# EAGLE board Sparkfun_LilyPad-Switched-Battery_Panel_v13 (EAGLE 7.5.0), part 1 of 2
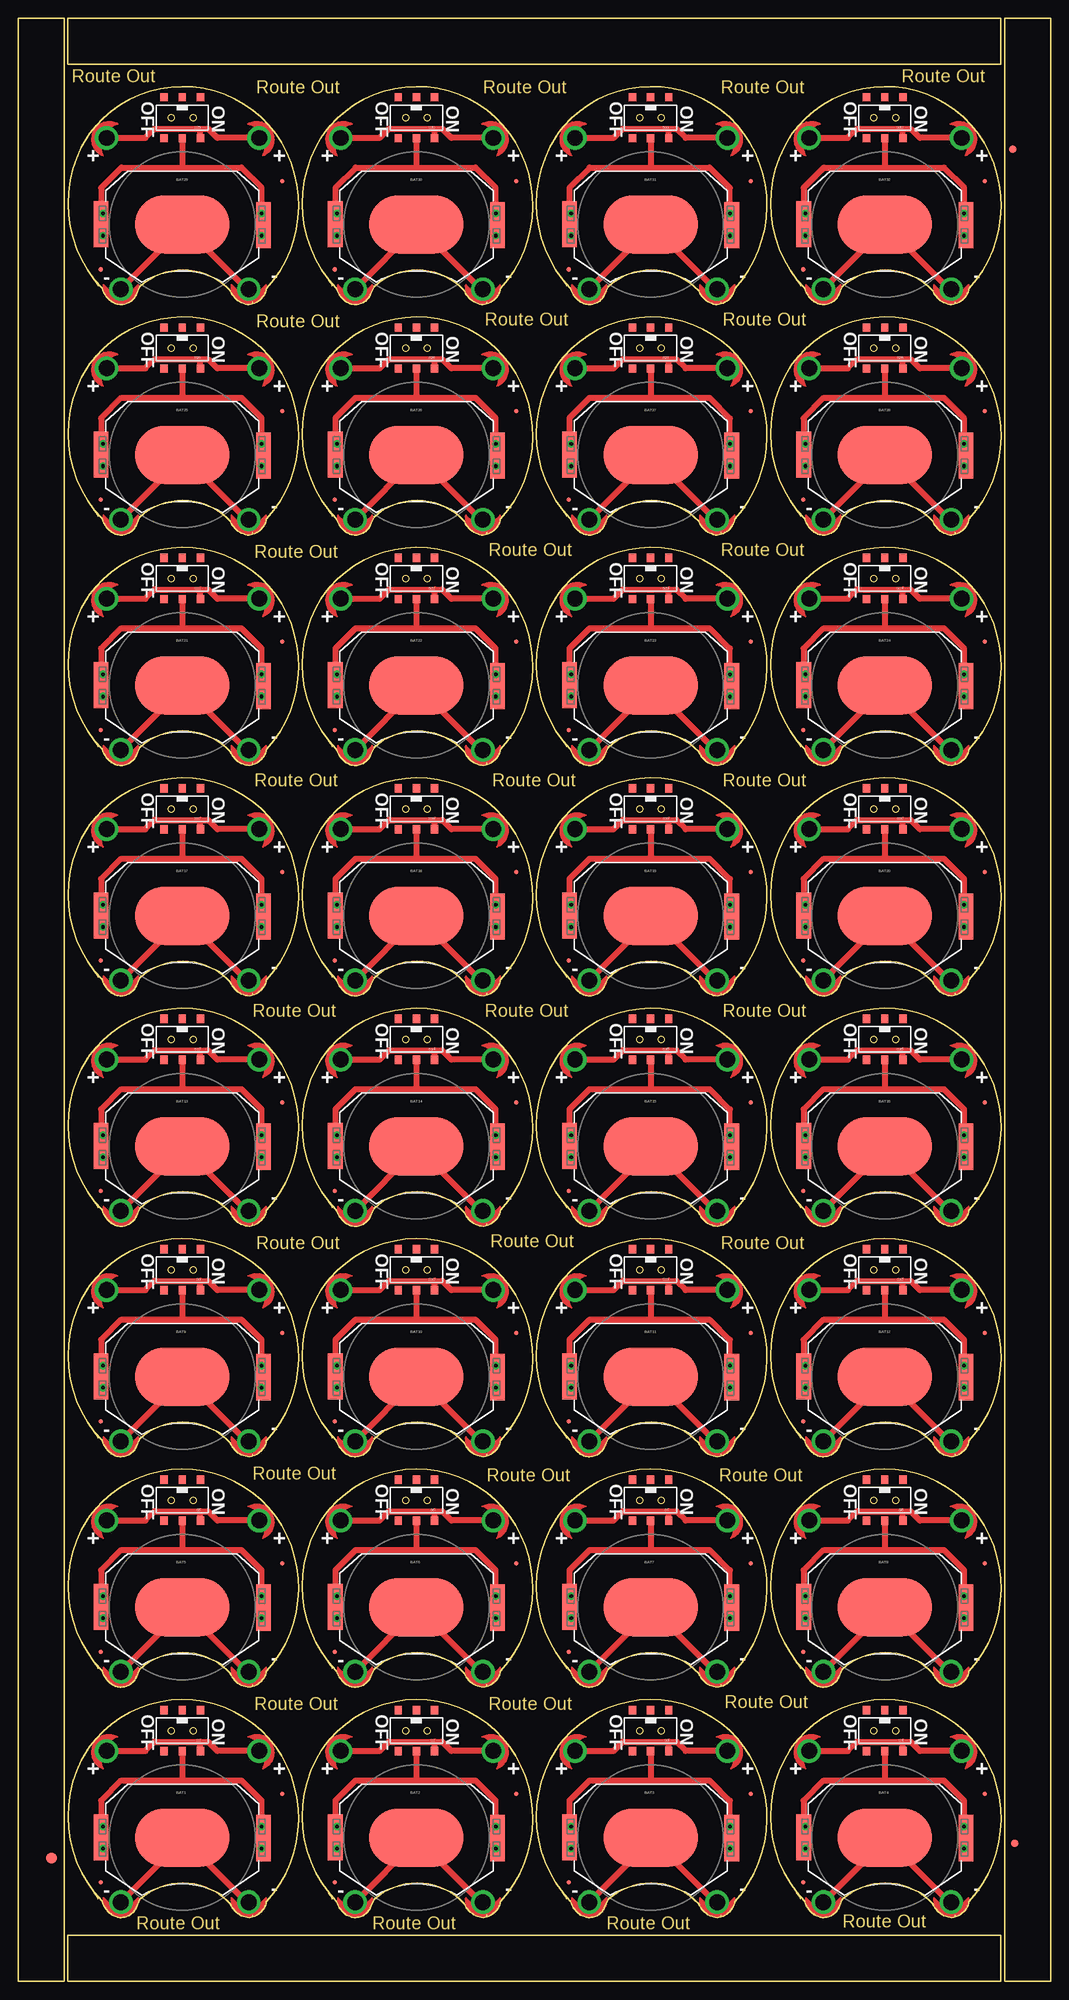
[diagram p0: board, top side]
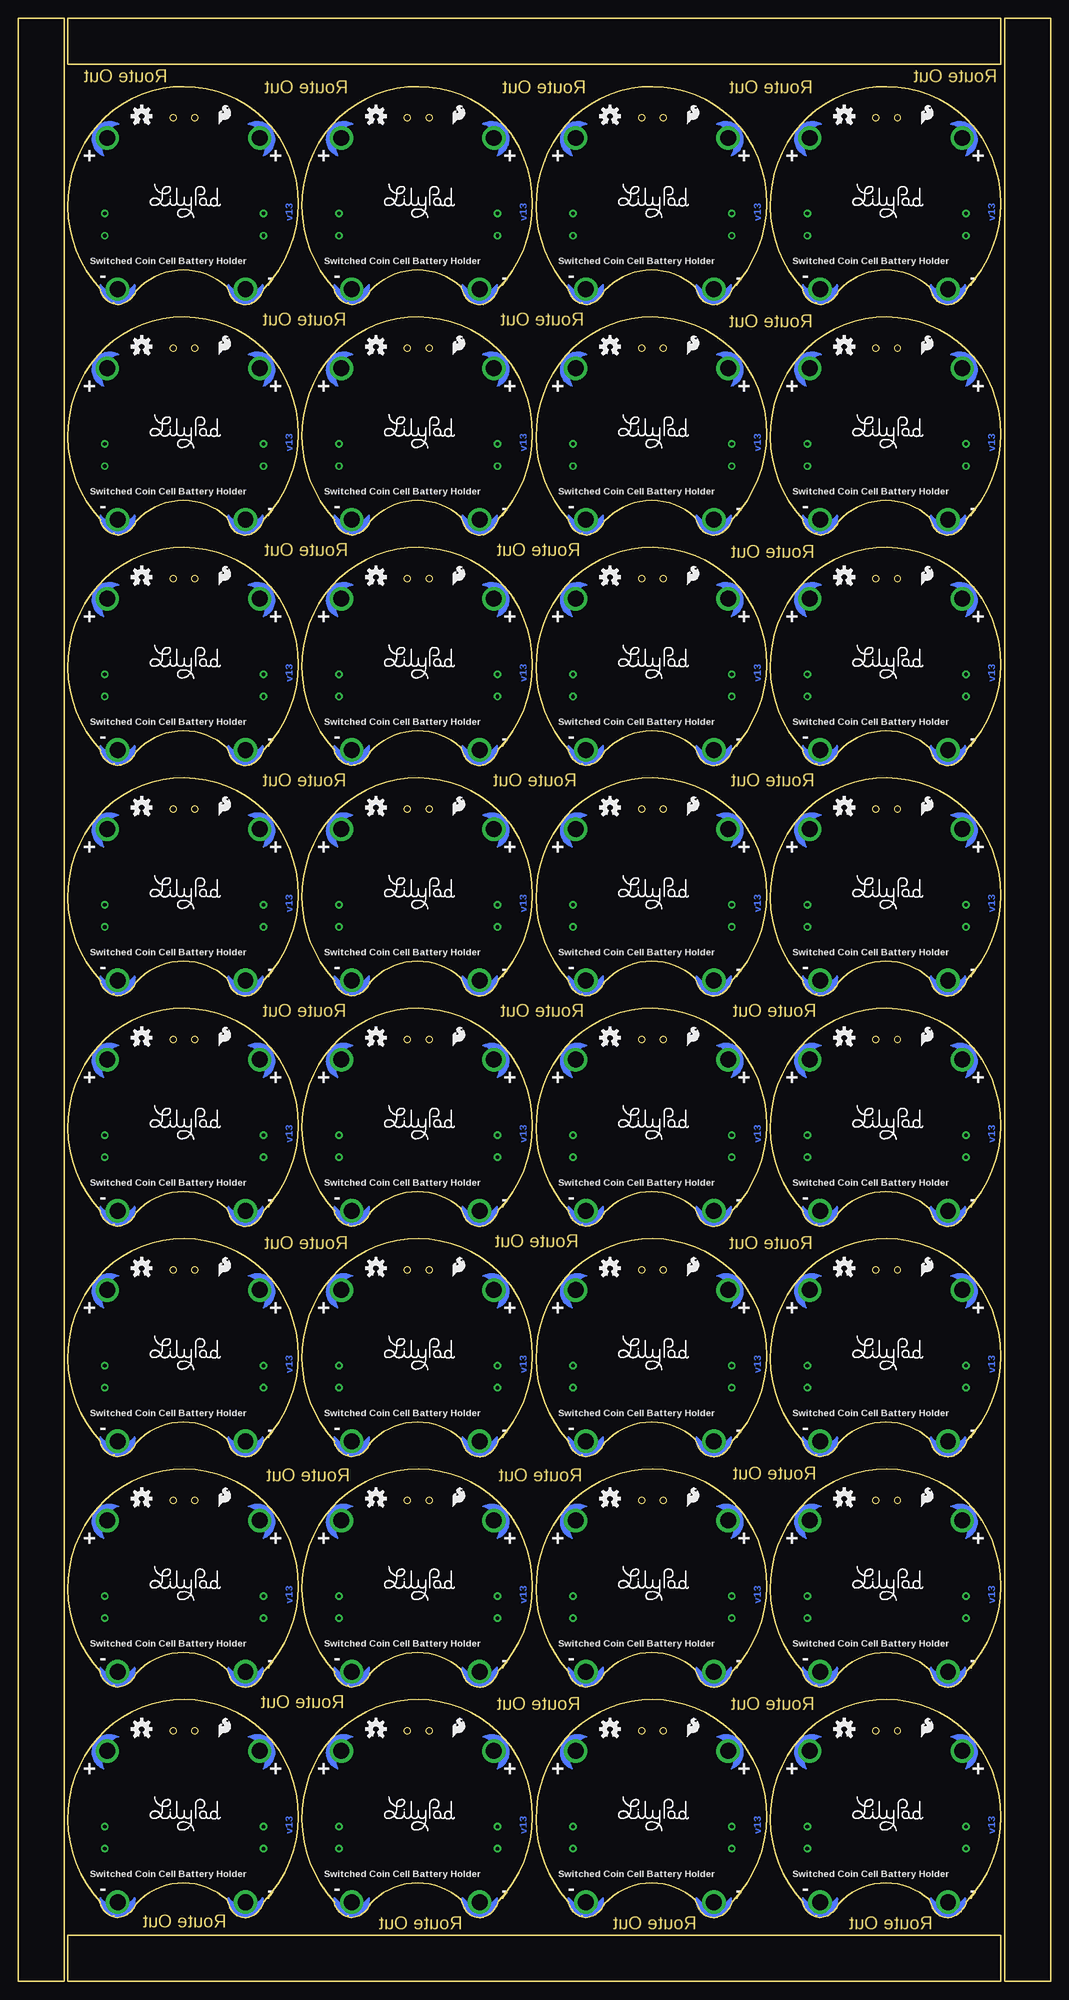
[diagram p1: board, bottom side, seen from below]

Size 142.24 x 270.51 mm. Coordinates in mm from the lower left corner, seen from the top.
Outline: 1880 segments
Outline: circle at 21.11,34.52 radius 0.42
Outline: circle at 24.11,34.52 radius 0.42
Outline: circle at 21.11,34.52 radius 0.42
Outline: circle at 24.11,34.52 radius 0.42
Outline: circle at 53.36,34.52 radius 0.42
Outline: circle at 56.36,34.52 radius 0.42
Outline: circle at 53.36,34.52 radius 0.42
Outline: circle at 56.36,34.52 radius 0.42
Outline: circle at 85.62,34.52 radius 0.42
Outline: circle at 88.62,34.52 radius 0.42
Outline: circle at 85.62,34.52 radius 0.42
Outline: circle at 88.62,34.52 radius 0.42
Outline: circle at 117.88,34.52 radius 0.42
Outline: circle at 120.88,34.52 radius 0.42
Outline: circle at 117.88,34.52 radius 0.42
Outline: circle at 120.88,34.52 radius 0.42
Outline: circle at 21.11,66.27 radius 0.42
Outline: circle at 24.11,66.27 radius 0.42
Outline: circle at 21.11,66.27 radius 0.42
Outline: circle at 24.11,66.27 radius 0.42
Copper layers (1*16): Top 0.035mm / dielectric 1.5mm / Bottom 0.035mm
Design rules "SparkFun-2-layer-STANDARD *": minimum track width 10mil, minimum drill 20mil, track to track 10mil, track to pad 8mil, pad to pad 8mil, via to via 10mil, smd to smd 8mil, copper to edge 8mil, drill to drill 8mil, minimum pad ring 10mil, minimum via ring 10mil, stop-mask expansion 4mil, vias tented up to drill 25mil, thermal gap 10mil
Net classes: 1 VCC: width 0.203 mm

## Footprints (pad centres in the part's own frame; a part is rotated, then mirrored left to right if it is on the bottom)
BATTCON_20MM_4LEGS = smd 13 x 8: NEGATIVE 0,0 | smd 2.032 x 3.175: POSITIVE@1 -11.176,1.651; POSITIVE@2 -11.176,-1.524; POSITIVE@3 11.176,1.524; POSITIVE@4 11.176,-1.651
PETAL-SMALL-2SIDE = drill 2.2: 1 0,0
FIDUCIAL-1.5X3 = smd 1.5 x 1.5: 1 0,0
FIDUCIAL-1X2 = smd 1 x 1: 1 0,0
MICRO-FIDUCIAL = smd 0.635 x 0.635: 1 0,0
AYZ0202 = smd 1 x 1.15: 1 -2.5,2.825; 2 0,2.825; 3 2.5,2.825; 4 -2.5,-2.825; 5 0,-2.825; 6 2.5,-2.825 | hole 0.85: 1.5,0; -1.5,0

## Placement (x,y rotation side)
BAT1  20mm coincell  [BATTCON_20MM_4LEGS]  22.61,19.81 0 top
BAT2  20mm coincell  [BATTCON_20MM_4LEGS]  54.86,19.81 0 top
BAT3  20mm coincell  [BATTCON_20MM_4LEGS]  87.12,19.81 0 top
BAT4  20mm coincell  [BATTCON_20MM_4LEGS]  119.38,19.81 0 top
BAT5  20mm coincell  [BATTCON_20MM_4LEGS]  22.61,51.56 0 top
BAT6  20mm coincell  [BATTCON_20MM_4LEGS]  54.86,51.56 0 top
BAT7  20mm coincell  [BATTCON_20MM_4LEGS]  87.12,51.56 0 top
BAT8  20mm coincell  [BATTCON_20MM_4LEGS]  119.38,51.56 0 top
BAT9  20mm coincell  [BATTCON_20MM_4LEGS]  22.61,83.31 0 top
BAT10  20mm coincell  [BATTCON_20MM_4LEGS]  54.86,83.31 0 top
BAT11  20mm coincell  [BATTCON_20MM_4LEGS]  87.12,83.31 0 top
BAT12  20mm coincell  [BATTCON_20MM_4LEGS]  119.38,83.31 0 top
BAT13  20mm coincell  [BATTCON_20MM_4LEGS]  22.61,115.06 0 top
BAT14  20mm coincell  [BATTCON_20MM_4LEGS]  54.86,115.06 0 top
BAT15  20mm coincell  [BATTCON_20MM_4LEGS]  87.12,115.06 0 top
BAT16  20mm coincell  [BATTCON_20MM_4LEGS]  119.38,115.06 0 top
BAT17  20mm coincell  [BATTCON_20MM_4LEGS]  22.61,146.81 0 top
BAT18  20mm coincell  [BATTCON_20MM_4LEGS]  54.86,146.81 0 top
BAT19  20mm coincell  [BATTCON_20MM_4LEGS]  87.12,146.81 0 top
BAT20  20mm coincell  [BATTCON_20MM_4LEGS]  119.38,146.81 0 top
BAT21  20mm coincell  [BATTCON_20MM_4LEGS]  22.61,178.56 0 top
BAT22  20mm coincell  [BATTCON_20MM_4LEGS]  54.86,178.56 0 top
BAT23  20mm coincell  [BATTCON_20MM_4LEGS]  87.12,178.56 0 top
BAT24  20mm coincell  [BATTCON_20MM_4LEGS]  119.38,178.56 0 top
BAT25  20mm coincell  [BATTCON_20MM_4LEGS]  22.61,210.31 0 top
BAT26  20mm coincell  [BATTCON_20MM_4LEGS]  54.86,210.31 0 top
BAT27  20mm coincell  [BATTCON_20MM_4LEGS]  87.12,210.31 0 top
BAT28  20mm coincell  [BATTCON_20MM_4LEGS]  119.38,210.31 0 top
BAT29  20mm coincell  [BATTCON_20MM_4LEGS]  22.61,242.06 0 top
BAT30  20mm coincell  [BATTCON_20MM_4LEGS]  54.86,242.06 0 top
BAT31  20mm coincell  [BATTCON_20MM_4LEGS]  87.12,242.06 0 top
BAT32  20mm coincell  [BATTCON_20MM_4LEGS]  119.38,242.06 0 top
BATB-  SEWTAP6  [PETAL-SMALL-2SIDE]  14.15,10.92 0 top
BATB-1  SEWTAP6  [PETAL-SMALL-2SIDE]  46.41,10.92 0 top
BATB-2  SEWTAP6  [PETAL-SMALL-2SIDE]  31.78,10.92 0 top
BATB-3  SEWTAP6  [PETAL-SMALL-2SIDE]  64.03,10.92 0 top
BATB-4  SEWTAP6  [PETAL-SMALL-2SIDE]  78.66,10.92 0 top
BATB-5  SEWTAP6  [PETAL-SMALL-2SIDE]  96.29,10.92 0 top
BATB-6  SEWTAP6  [PETAL-SMALL-2SIDE]  110.92,10.92 0 top
BATB-7  SEWTAP6  [PETAL-SMALL-2SIDE]  128.55,10.92 0 top
BATB-8  SEWTAP6  [PETAL-SMALL-2SIDE]  14.15,42.67 0 top
BATB-9  SEWTAP6  [PETAL-SMALL-2SIDE]  31.78,42.67 0 top
BATB-10  SEWTAP6  [PETAL-SMALL-2SIDE]  46.41,42.67 0 top
BATB-11  SEWTAP6  [PETAL-SMALL-2SIDE]  64.03,42.67 0 top
BATB-12  SEWTAP6  [PETAL-SMALL-2SIDE]  78.66,42.67 0 top
BATB-13  SEWTAP6  [PETAL-SMALL-2SIDE]  96.29,42.67 0 top
BATB-14  SEWTAP6  [PETAL-SMALL-2SIDE]  110.92,42.67 0 top
BATB-15  SEWTAP6  [PETAL-SMALL-2SIDE]  128.55,42.67 0 top
BATB-16  SEWTAP6  [PETAL-SMALL-2SIDE]  14.15,74.42 0 top
BATB-17  SEWTAP6  [PETAL-SMALL-2SIDE]  31.78,74.42 0 top
BATB-18  SEWTAP6  [PETAL-SMALL-2SIDE]  46.41,74.42 0 top
BATB-19  SEWTAP6  [PETAL-SMALL-2SIDE]  64.03,74.42 0 top
BATB-20  SEWTAP6  [PETAL-SMALL-2SIDE]  78.66,74.42 0 top
BATB-21  SEWTAP6  [PETAL-SMALL-2SIDE]  96.29,74.42 0 top
BATB-22  SEWTAP6  [PETAL-SMALL-2SIDE]  110.92,74.42 0 top
BATB-23  SEWTAP6  [PETAL-SMALL-2SIDE]  128.55,74.42 0 top
BATB-24  SEWTAP6  [PETAL-SMALL-2SIDE]  14.15,106.17 0 top
BATB-25  SEWTAP6  [PETAL-SMALL-2SIDE]  31.78,106.17 0 top
BATB-26  SEWTAP6  [PETAL-SMALL-2SIDE]  46.41,106.17 0 top
BATB-27  SEWTAP6  [PETAL-SMALL-2SIDE]  64.03,106.17 0 top
BATB-28  SEWTAP6  [PETAL-SMALL-2SIDE]  78.66,106.17 0 top
BATB-29  SEWTAP6  [PETAL-SMALL-2SIDE]  96.29,106.17 0 top
BATB-30  SEWTAP6  [PETAL-SMALL-2SIDE]  110.92,106.17 0 top
BATB-31  SEWTAP6  [PETAL-SMALL-2SIDE]  128.55,106.17 0 top
BATB-32  SEWTAP6  [PETAL-SMALL-2SIDE]  14.15,137.92 0 top
BATB-33  SEWTAP6  [PETAL-SMALL-2SIDE]  31.78,137.92 0 top
BATB-34  SEWTAP6  [PETAL-SMALL-2SIDE]  46.41,137.92 0 top
BATB-35  SEWTAP6  [PETAL-SMALL-2SIDE]  64.03,137.92 0 top
BATB-36  SEWTAP6  [PETAL-SMALL-2SIDE]  78.66,137.92 0 top
BATB-37  SEWTAP6  [PETAL-SMALL-2SIDE]  96.29,137.92 0 top
BATB-38  SEWTAP6  [PETAL-SMALL-2SIDE]  110.92,137.92 0 top
BATB-39  SEWTAP6  [PETAL-SMALL-2SIDE]  128.55,137.92 0 top
BATB-40  SEWTAP6  [PETAL-SMALL-2SIDE]  14.15,169.67 0 top
BATB-41  SEWTAP6  [PETAL-SMALL-2SIDE]  31.78,169.67 0 top
BATB-42  SEWTAP6  [PETAL-SMALL-2SIDE]  46.41,169.67 0 top
BATB-43  SEWTAP6  [PETAL-SMALL-2SIDE]  64.03,169.67 0 top
BATB-44  SEWTAP6  [PETAL-SMALL-2SIDE]  78.66,169.67 0 top
BATB-45  SEWTAP6  [PETAL-SMALL-2SIDE]  96.29,169.67 0 top
BATB-46  SEWTAP6  [PETAL-SMALL-2SIDE]  110.92,169.67 0 top
BATB-47  SEWTAP6  [PETAL-SMALL-2SIDE]  128.55,169.67 0 top
BATB-48  SEWTAP6  [PETAL-SMALL-2SIDE]  14.15,201.42 0 top
BATB-49  SEWTAP6  [PETAL-SMALL-2SIDE]  31.78,201.42 0 top
BATB-50  SEWTAP6  [PETAL-SMALL-2SIDE]  46.41,201.42 0 top
BATB-51  SEWTAP6  [PETAL-SMALL-2SIDE]  64.03,201.42 0 top
BATB-52  SEWTAP6  [PETAL-SMALL-2SIDE]  78.66,201.42 0 top
BATB-53  SEWTAP6  [PETAL-SMALL-2SIDE]  96.29,201.42 0 top
BATB-54  SEWTAP6  [PETAL-SMALL-2SIDE]  110.92,201.42 0 top
BATB-55  SEWTAP6  [PETAL-SMALL-2SIDE]  128.55,201.42 0 top
BATB-56  SEWTAP6  [PETAL-SMALL-2SIDE]  14.15,233.17 0 top
BATB-57  SEWTAP6  [PETAL-SMALL-2SIDE]  31.78,233.17 0 top
BATB-58  SEWTAP6  [PETAL-SMALL-2SIDE]  46.41,233.17 0 top
BATB-59  SEWTAP6  [PETAL-SMALL-2SIDE]  64.03,233.17 0 top
BATB-60  SEWTAP6  [PETAL-SMALL-2SIDE]  78.66,233.17 0 top
BATB-61  SEWTAP6  [PETAL-SMALL-2SIDE]  96.29,233.17 0 top
BATB-62  SEWTAP6  [PETAL-SMALL-2SIDE]  110.92,233.17 0 top
BATB-63  SEWTAP6  [PETAL-SMALL-2SIDE]  128.55,233.17 0 top
BATT+  SEWTAP6  [PETAL-SMALL-2SIDE]  12.19,31.75 245 top
BATT+1  SEWTAP6  [PETAL-SMALL-2SIDE]  44.45,31.75 245 top
BATT+2  SEWTAP6  [PETAL-SMALL-2SIDE]  33.2,31.75 115 top
BATT+3  SEWTAP6  [PETAL-SMALL-2SIDE]  65.46,31.75 115 top
BATT+4  SEWTAP6  [PETAL-SMALL-2SIDE]  76.71,31.75 245 top
BATT+5  SEWTAP6  [PETAL-SMALL-2SIDE]  97.71,31.75 115 top
BATT+6  SEWTAP6  [PETAL-SMALL-2SIDE]  108.97,31.75 245 top
BATT+7  SEWTAP6  [PETAL-SMALL-2SIDE]  129.97,31.75 115 top
BATT+8  SEWTAP6  [PETAL-SMALL-2SIDE]  12.19,63.5 245 top
BATT+9  SEWTAP6  [PETAL-SMALL-2SIDE]  33.2,63.5 115 top
BATT+10  SEWTAP6  [PETAL-SMALL-2SIDE]  44.45,63.5 245 top
BATT+11  SEWTAP6  [PETAL-SMALL-2SIDE]  65.46,63.5 115 top
BATT+12  SEWTAP6  [PETAL-SMALL-2SIDE]  76.71,63.5 245 top
BATT+13  SEWTAP6  [PETAL-SMALL-2SIDE]  97.71,63.5 115 top
BATT+14  SEWTAP6  [PETAL-SMALL-2SIDE]  108.97,63.5 245 top
BATT+15  SEWTAP6  [PETAL-SMALL-2SIDE]  129.97,63.5 115 top
BATT+16  SEWTAP6  [PETAL-SMALL-2SIDE]  12.19,95.25 245 top
BATT+17  SEWTAP6  [PETAL-SMALL-2SIDE]  33.2,95.25 115 top
BATT+18  SEWTAP6  [PETAL-SMALL-2SIDE]  44.45,95.25 245 top
BATT+19  SEWTAP6  [PETAL-SMALL-2SIDE]  65.46,95.25 115 top
BATT+20  SEWTAP6  [PETAL-SMALL-2SIDE]  76.71,95.25 245 top
BATT+21  SEWTAP6  [PETAL-SMALL-2SIDE]  97.71,95.25 115 top
BATT+22  SEWTAP6  [PETAL-SMALL-2SIDE]  108.97,95.25 245 top
BATT+23  SEWTAP6  [PETAL-SMALL-2SIDE]  129.97,95.25 115 top
BATT+24  SEWTAP6  [PETAL-SMALL-2SIDE]  12.19,127 245 top
BATT+25  SEWTAP6  [PETAL-SMALL-2SIDE]  33.2,127 115 top
BATT+26  SEWTAP6  [PETAL-SMALL-2SIDE]  44.45,127 245 top
BATT+27  SEWTAP6  [PETAL-SMALL-2SIDE]  65.46,127 115 top
BATT+28  SEWTAP6  [PETAL-SMALL-2SIDE]  76.71,127 245 top
BATT+29  SEWTAP6  [PETAL-SMALL-2SIDE]  97.71,127 115 top
BATT+30  SEWTAP6  [PETAL-SMALL-2SIDE]  108.97,127 245 top
BATT+31  SEWTAP6  [PETAL-SMALL-2SIDE]  129.97,127 115 top
BATT+32  SEWTAP6  [PETAL-SMALL-2SIDE]  12.19,158.75 245 top
BATT+33  SEWTAP6  [PETAL-SMALL-2SIDE]  33.2,158.75 115 top
BATT+34  SEWTAP6  [PETAL-SMALL-2SIDE]  44.45,158.75 245 top
BATT+35  SEWTAP6  [PETAL-SMALL-2SIDE]  65.46,158.75 115 top
BATT+36  SEWTAP6  [PETAL-SMALL-2SIDE]  76.71,158.75 245 top
BATT+37  SEWTAP6  [PETAL-SMALL-2SIDE]  97.71,158.75 115 top
BATT+38  SEWTAP6  [PETAL-SMALL-2SIDE]  108.97,158.75 245 top
BATT+39  SEWTAP6  [PETAL-SMALL-2SIDE]  129.97,158.75 115 top
BATT+40  SEWTAP6  [PETAL-SMALL-2SIDE]  12.19,190.5 245 top
BATT+41  SEWTAP6  [PETAL-SMALL-2SIDE]  33.2,190.5 115 top
BATT+42  SEWTAP6  [PETAL-SMALL-2SIDE]  44.45,190.5 245 top
BATT+43  SEWTAP6  [PETAL-SMALL-2SIDE]  65.46,190.5 115 top
BATT+44  SEWTAP6  [PETAL-SMALL-2SIDE]  76.71,190.5 245 top
BATT+45  SEWTAP6  [PETAL-SMALL-2SIDE]  97.71,190.5 115 top
BATT+46  SEWTAP6  [PETAL-SMALL-2SIDE]  108.97,190.5 245 top
BATT+47  SEWTAP6  [PETAL-SMALL-2SIDE]  129.97,190.5 115 top
BATT+48  SEWTAP6  [PETAL-SMALL-2SIDE]  12.19,222.25 245 top
BATT+49  SEWTAP6  [PETAL-SMALL-2SIDE]  33.2,222.25 115 top
BATT+50  SEWTAP6  [PETAL-SMALL-2SIDE]  44.45,222.25 245 top
BATT+51  SEWTAP6  [PETAL-SMALL-2SIDE]  65.46,222.25 115 top
BATT+52  SEWTAP6  [PETAL-SMALL-2SIDE]  76.71,222.25 245 top
BATT+53  SEWTAP6  [PETAL-SMALL-2SIDE]  97.71,222.25 115 top
BATT+54  SEWTAP6  [PETAL-SMALL-2SIDE]  108.97,222.25 245 top
BATT+55  SEWTAP6  [PETAL-SMALL-2SIDE]  129.97,222.25 115 top
BATT+56  SEWTAP6  [PETAL-SMALL-2SIDE]  12.19,254 245 top
BATT+57  SEWTAP6  [PETAL-SMALL-2SIDE]  33.2,254 115 top
BATT+58  SEWTAP6  [PETAL-SMALL-2SIDE]  44.45,254 245 top
BATT+59  SEWTAP6  [PETAL-SMALL-2SIDE]  65.46,254 115 top
BATT+60  SEWTAP6  [PETAL-SMALL-2SIDE]  76.71,254 245 top
BATT+61  SEWTAP6  [PETAL-SMALL-2SIDE]  97.71,254 115 top
BATT+62  SEWTAP6  [PETAL-SMALL-2SIDE]  108.97,254 245 top
BATT+63  SEWTAP6  [PETAL-SMALL-2SIDE]  129.97,254 115 top
E$1  [FIDUCIAL-1.5X3]  4.57,17.02 0 top
E$5  [FIDUCIAL-1X2]  137.29,19.05 0 top
E$6  [FIDUCIAL-1X2]  137.03,252.48 180 top
FD1  FIDUCIALUFIDUCIAL  [MICRO-FIDUCIAL]  36.39,25.82 0 top
FD2  FIDUCIALUFIDUCIAL  [MICRO-FIDUCIAL]  11.36,13.63 0 top
FD3  FIDUCIALUFIDUCIAL  [MICRO-FIDUCIAL]  68.65,25.82 0 top
FD4  FIDUCIALUFIDUCIAL  [MICRO-FIDUCIAL]  43.61,13.63 0 top
FD5  FIDUCIALUFIDUCIAL  [MICRO-FIDUCIAL]  100.9,25.82 0 top
FD6  FIDUCIALUFIDUCIAL  [MICRO-FIDUCIAL]  75.87,13.63 0 top
FD7  FIDUCIALUFIDUCIAL  [MICRO-FIDUCIAL]  133.16,25.82 0 top
FD8  FIDUCIALUFIDUCIAL  [MICRO-FIDUCIAL]  108.13,13.63 0 top
FD9  FIDUCIALUFIDUCIAL  [MICRO-FIDUCIAL]  36.39,57.57 0 top
FD10  FIDUCIALUFIDUCIAL  [MICRO-FIDUCIAL]  11.36,45.38 0 top
FD11  FIDUCIALUFIDUCIAL  [MICRO-FIDUCIAL]  68.65,57.57 0 top
FD12  FIDUCIALUFIDUCIAL  [MICRO-FIDUCIAL]  43.61,45.38 0 top
FD13  FIDUCIALUFIDUCIAL  [MICRO-FIDUCIAL]  100.9,57.57 0 top
FD14  FIDUCIALUFIDUCIAL  [MICRO-FIDUCIAL]  75.87,45.38 0 top
FD15  FIDUCIALUFIDUCIAL  [MICRO-FIDUCIAL]  133.16,57.57 0 top
FD16  FIDUCIALUFIDUCIAL  [MICRO-FIDUCIAL]  108.13,45.38 0 top
FD17  FIDUCIALUFIDUCIAL  [MICRO-FIDUCIAL]  36.39,89.32 0 top
FD18  FIDUCIALUFIDUCIAL  [MICRO-FIDUCIAL]  11.36,77.13 0 top
FD19  FIDUCIALUFIDUCIAL  [MICRO-FIDUCIAL]  68.65,89.32 0 top
FD20  FIDUCIALUFIDUCIAL  [MICRO-FIDUCIAL]  43.61,77.13 0 top
FD21  FIDUCIALUFIDUCIAL  [MICRO-FIDUCIAL]  100.9,89.32 0 top
FD22  FIDUCIALUFIDUCIAL  [MICRO-FIDUCIAL]  75.87,77.13 0 top
FD23  FIDUCIALUFIDUCIAL  [MICRO-FIDUCIAL]  133.16,89.32 0 top
FD24  FIDUCIALUFIDUCIAL  [MICRO-FIDUCIAL]  108.13,77.13 0 top
FD25  FIDUCIALUFIDUCIAL  [MICRO-FIDUCIAL]  36.39,121.07 0 top
FD26  FIDUCIALUFIDUCIAL  [MICRO-FIDUCIAL]  11.36,108.88 0 top
FD27  FIDUCIALUFIDUCIAL  [MICRO-FIDUCIAL]  68.65,121.07 0 top
FD28  FIDUCIALUFIDUCIAL  [MICRO-FIDUCIAL]  43.61,108.88 0 top
FD29  FIDUCIALUFIDUCIAL  [MICRO-FIDUCIAL]  100.9,121.07 0 top
FD30  FIDUCIALUFIDUCIAL  [MICRO-FIDUCIAL]  75.87,108.88 0 top
FD31  FIDUCIALUFIDUCIAL  [MICRO-FIDUCIAL]  133.16,121.07 0 top
FD32  FIDUCIALUFIDUCIAL  [MICRO-FIDUCIAL]  108.13,108.88 0 top
FD33  FIDUCIALUFIDUCIAL  [MICRO-FIDUCIAL]  36.39,152.82 0 top
FD34  FIDUCIALUFIDUCIAL  [MICRO-FIDUCIAL]  11.36,140.63 0 top
FD35  FIDUCIALUFIDUCIAL  [MICRO-FIDUCIAL]  68.65,152.82 0 top
FD36  FIDUCIALUFIDUCIAL  [MICRO-FIDUCIAL]  43.61,140.63 0 top
FD37  FIDUCIALUFIDUCIAL  [MICRO-FIDUCIAL]  100.9,152.82 0 top
FD38  FIDUCIALUFIDUCIAL  [MICRO-FIDUCIAL]  75.87,140.63 0 top
FD39  FIDUCIALUFIDUCIAL  [MICRO-FIDUCIAL]  133.16,152.82 0 top
FD40  FIDUCIALUFIDUCIAL  [MICRO-FIDUCIAL]  108.13,140.63 0 top
FD41  FIDUCIALUFIDUCIAL  [MICRO-FIDUCIAL]  36.39,184.57 0 top
FD42  FIDUCIALUFIDUCIAL  [MICRO-FIDUCIAL]  11.36,172.38 0 top
FD43  FIDUCIALUFIDUCIAL  [MICRO-FIDUCIAL]  68.65,184.57 0 top
FD44  FIDUCIALUFIDUCIAL  [MICRO-FIDUCIAL]  43.61,172.38 0 top
FD45  FIDUCIALUFIDUCIAL  [MICRO-FIDUCIAL]  100.9,184.57 0 top
FD46  FIDUCIALUFIDUCIAL  [MICRO-FIDUCIAL]  75.87,172.38 0 top
FD47  FIDUCIALUFIDUCIAL  [MICRO-FIDUCIAL]  133.16,184.57 0 top
FD48  FIDUCIALUFIDUCIAL  [MICRO-FIDUCIAL]  108.13,172.38 0 top
FD49  FIDUCIALUFIDUCIAL  [MICRO-FIDUCIAL]  36.39,216.32 0 top
FD50  FIDUCIALUFIDUCIAL  [MICRO-FIDUCIAL]  11.36,204.13 0 top
FD51  FIDUCIALUFIDUCIAL  [MICRO-FIDUCIAL]  68.65,216.32 0 top
FD52  FIDUCIALUFIDUCIAL  [MICRO-FIDUCIAL]  43.61,204.13 0 top
FD53  FIDUCIALUFIDUCIAL  [MICRO-FIDUCIAL]  100.9,216.32 0 top
FD54  FIDUCIALUFIDUCIAL  [MICRO-FIDUCIAL]  75.87,204.13 0 top
FD55  FIDUCIALUFIDUCIAL  [MICRO-FIDUCIAL]  133.16,216.32 0 top
FD56  FIDUCIALUFIDUCIAL  [MICRO-FIDUCIAL]  108.13,204.13 0 top
FD57  FIDUCIALUFIDUCIAL  [MICRO-FIDUCIAL]  36.39,248.07 0 top
FD58  FIDUCIALUFIDUCIAL  [MICRO-FIDUCIAL]  11.36,235.88 0 top
FD59  FIDUCIALUFIDUCIAL  [MICRO-FIDUCIAL]  68.65,248.07 0 top
FD60  FIDUCIALUFIDUCIAL  [MICRO-FIDUCIAL]  43.61,235.88 0 top
FD61  FIDUCIALUFIDUCIAL  [MICRO-FIDUCIAL]  100.9,248.07 0 top
FD62  FIDUCIALUFIDUCIAL  [MICRO-FIDUCIAL]  75.87,235.88 0 top
FD63  FIDUCIALUFIDUCIAL  [MICRO-FIDUCIAL]  133.16,248.07 0 top
FD64  FIDUCIALUFIDUCIAL  [MICRO-FIDUCIAL]  108.13,235.88 0 top
LOGO1  SFE_LOGO_FLAME.1_INCH  [SFE_LOGO_FLAME_.1]  18.16,33.32 0 bottom
LOGO2  OSHW-LOGOS  [OSHW-LOGO-S]  28.45,34.75 0 bottom
LOGO3  SFE_LOGO_FLAME.1_INCH  [SFE_LOGO_FLAME_.1]  50.42,33.32 0 bottom
LOGO4  OSHW-LOGOS  [OSHW-LOGO-S]  60.71,34.75 0 bottom
LOGO5  SFE_LOGO_FLAME.1_INCH  [SFE_LOGO_FLAME_.1]  82.68,33.32 0 bottom
LOGO6  OSHW-LOGOS  [OSHW-LOGO-S]  92.96,34.75 0 bottom
LOGO7  SFE_LOGO_FLAME.1_INCH  [SFE_LOGO_FLAME_.1]  114.94,33.32 0 bottom
LOGO8  OSHW-LOGOS  [OSHW-LOGO-S]  125.22,34.75 0 bottom
LOGO9  SFE_LOGO_FLAME.1_INCH  [SFE_LOGO_FLAME_.1]  18.16,65.07 0 bottom
LOGO10  OSHW-LOGOS  [OSHW-LOGO-S]  28.45,66.5 0 bottom
LOGO11  SFE_LOGO_FLAME.1_INCH  [SFE_LOGO_FLAME_.1]  50.42,65.07 0 bottom
LOGO12  OSHW-LOGOS  [OSHW-LOGO-S]  60.71,66.5 0 bottom
LOGO13  SFE_LOGO_FLAME.1_INCH  [SFE_LOGO_FLAME_.1]  82.68,65.07 0 bottom
LOGO14  OSHW-LOGOS  [OSHW-LOGO-S]  92.96,66.5 0 bottom
LOGO15  SFE_LOGO_FLAME.1_INCH  [SFE_LOGO_FLAME_.1]  114.94,65.07 0 bottom
LOGO16  OSHW-LOGOS  [OSHW-LOGO-S]  125.22,66.5 0 bottom
LOGO17  SFE_LOGO_FLAME.1_INCH  [SFE_LOGO_FLAME_.1]  18.16,96.82 0 bottom
LOGO18  OSHW-LOGOS  [OSHW-LOGO-S]  28.45,98.25 0 bottom
LOGO19  SFE_LOGO_FLAME.1_INCH  [SFE_LOGO_FLAME_.1]  50.42,96.82 0 bottom
LOGO20  OSHW-LOGOS  [OSHW-LOGO-S]  60.71,98.25 0 bottom
LOGO21  SFE_LOGO_FLAME.1_INCH  [SFE_LOGO_FLAME_.1]  82.68,96.82 0 bottom
LOGO22  OSHW-LOGOS  [OSHW-LOGO-S]  92.96,98.25 0 bottom
LOGO23  SFE_LOGO_FLAME.1_INCH  [SFE_LOGO_FLAME_.1]  114.94,96.82 0 bottom
LOGO24  OSHW-LOGOS  [OSHW-LOGO-S]  125.22,98.25 0 bottom
LOGO25  SFE_LOGO_FLAME.1_INCH  [SFE_LOGO_FLAME_.1]  18.16,128.57 0 bottom
LOGO26  OSHW-LOGOS  [OSHW-LOGO-S]  28.45,130 0 bottom
LOGO27  SFE_LOGO_FLAME.1_INCH  [SFE_LOGO_FLAME_.1]  50.42,128.57 0 bottom
LOGO28  OSHW-LOGOS  [OSHW-LOGO-S]  60.71,130 0 bottom
LOGO29  SFE_LOGO_FLAME.1_INCH  [SFE_LOGO_FLAME_.1]  82.68,128.57 0 bottom
LOGO30  OSHW-LOGOS  [OSHW-LOGO-S]  92.96,130 0 bottom
LOGO31  SFE_LOGO_FLAME.1_INCH  [SFE_LOGO_FLAME_.1]  114.94,128.57 0 bottom
LOGO32  OSHW-LOGOS  [OSHW-LOGO-S]  125.22,130 0 bottom
LOGO33  SFE_LOGO_FLAME.1_INCH  [SFE_LOGO_FLAME_.1]  18.16,160.32 0 bottom
LOGO34  OSHW-LOGOS  [OSHW-LOGO-S]  28.45,161.75 0 bottom
LOGO35  SFE_LOGO_FLAME.1_INCH  [SFE_LOGO_FLAME_.1]  50.42,160.32 0 bottom
LOGO36  OSHW-LOGOS  [OSHW-LOGO-S]  60.71,161.75 0 bottom
LOGO37  SFE_LOGO_FLAME.1_INCH  [SFE_LOGO_FLAME_.1]  82.68,160.32 0 bottom
LOGO38  OSHW-LOGOS  [OSHW-LOGO-S]  92.96,161.75 0 bottom
LOGO39  SFE_LOGO_FLAME.1_INCH  [SFE_LOGO_FLAME_.1]  114.94,160.32 0 bottom
LOGO40  OSHW-LOGOS  [OSHW-LOGO-S]  125.22,161.75 0 bottom
LOGO41  SFE_LOGO_FLAME.1_INCH  [SFE_LOGO_FLAME_.1]  18.16,192.07 0 bottom
LOGO42  OSHW-LOGOS  [OSHW-LOGO-S]  28.45,193.5 0 bottom
LOGO43  SFE_LOGO_FLAME.1_INCH  [SFE_LOGO_FLAME_.1]  50.42,192.07 0 bottom
LOGO44  OSHW-LOGOS  [OSHW-LOGO-S]  60.71,193.5 0 bottom
LOGO45  SFE_LOGO_FLAME.1_INCH  [SFE_LOGO_FLAME_.1]  82.68,192.07 0 bottom
LOGO46  OSHW-LOGOS  [OSHW-LOGO-S]  92.96,193.5 0 bottom
LOGO47  SFE_LOGO_FLAME.1_INCH  [SFE_LOGO_FLAME_.1]  114.94,192.07 0 bottom
LOGO48  OSHW-LOGOS  [OSHW-LOGO-S]  125.22,193.5 0 bottom
LOGO49  SFE_LOGO_FLAME.1_INCH  [SFE_LOGO_FLAME_.1]  18.16,223.82 0 bottom
LOGO50  OSHW-LOGOS  [OSHW-LOGO-S]  28.45,225.25 0 bottom
LOGO51  SFE_LOGO_FLAME.1_INCH  [SFE_LOGO_FLAME_.1]  50.42,223.82 0 bottom
LOGO52  OSHW-LOGOS  [OSHW-LOGO-S]  60.71,225.25 0 bottom
LOGO53  SFE_LOGO_FLAME.1_INCH  [SFE_LOGO_FLAME_.1]  82.68,223.82 0 bottom
LOGO54  OSHW-LOGOS  [OSHW-LOGO-S]  92.96,225.25 0 bottom
LOGO55  SFE_LOGO_FLAME.1_INCH  [SFE_LOGO_FLAME_.1]  114.94,223.82 0 bottom
LOGO56  OSHW-LOGOS  [OSHW-LOGO-S]  125.22,225.25 0 bottom
LOGO57  SFE_LOGO_FLAME.1_INCH  [SFE_LOGO_FLAME_.1]  18.16,255.57 0 bottom
LOGO58  OSHW-LOGOS  [OSHW-LOGO-S]  28.45,257 0 bottom
LOGO59  SFE_LOGO_FLAME.1_INCH  [SFE_LOGO_FLAME_.1]  50.42,255.57 0 bottom
LOGO60  OSHW-LOGOS  [OSHW-LOGO-S]  60.71,257 0 bottom
LOGO61  SFE_LOGO_FLAME.1_INCH  [SFE_LOGO_FLAME_.1]  82.68,255.57 0 bottom
LOGO62  OSHW-LOGOS  [OSHW-LOGO-S]  92.96,257 0 bottom
LOGO63  SFE_LOGO_FLAME.1_INCH  [SFE_LOGO_FLAME_.1]  114.94,255.57 0 bottom
LOGO64  OSHW-LOGOS  [OSHW-LOGO-S]  125.22,257 0 bottom
S1  [AYZ0202]  22.61,34.54 180 top
S2  [AYZ0202]  54.86,34.54 180 top
S3  [AYZ0202]  87.12,34.54 180 top
S4  [AYZ0202]  119.38,34.54 180 top
S5  [AYZ0202]  22.61,66.29 180 top
S6  [AYZ0202]  54.86,66.29 180 top
S7  [AYZ0202]  87.12,66.29 180 top
S8  [AYZ0202]  119.38,66.29 180 top
S9  [AYZ0202]  22.61,98.04 180 top
S10  [AYZ0202]  54.86,98.04 180 top
S11  [AYZ0202]  87.12,98.04 180 top
S12  [AYZ0202]  119.38,98.04 180 top
S13  [AYZ0202]  22.61,129.79 180 top
S14  [AYZ0202]  54.86,129.79 180 top
S15  [AYZ0202]  87.12,129.79 180 top
S16  [AYZ0202]  119.38,129.79 180 top
S17  [AYZ0202]  22.61,161.54 180 top
S18  [AYZ0202]  54.86,161.54 180 top
S19  [AYZ0202]  87.12,161.54 180 top
S20  [AYZ0202]  119.38,161.54 180 top
S21  [AYZ0202]  22.61,193.29 180 top
S22  [AYZ0202]  54.86,193.29 180 top
S23  [AYZ0202]  87.12,193.29 180 top
S24  [AYZ0202]  119.38,193.29 180 top
S25  [AYZ0202]  22.61,225.04 180 top
S26  [AYZ0202]  54.86,225.04 180 top
S27  [AYZ0202]  87.12,225.04 180 top
S28  [AYZ0202]  119.38,225.04 180 top
S29  [AYZ0202]  22.61,256.79 180 top
S30  [AYZ0202]  54.86,256.79 180 top
S31  [AYZ0202]  87.12,256.79 180 top
S32  [AYZ0202]  119.38,256.79 180 top
U$1  [LOGO-LILYPAD]  54.66,23.42 0 bottom
U$2  [LOGO-LILYPAD]  86.92,23.42 0 bottom
U$3  [LOGO-LILYPAD]  22.4,23.42 0 bottom
U$4  [LOGO-LILYPAD]  119.18,23.42 0 bottom
U$5  [LOGO-LILYPAD]  22.4,55.17 0 bottom
U$6  [LOGO-LILYPAD]  54.66,55.17 0 bottom
U$7  [LOGO-LILYPAD]  86.92,55.17 0 bottom
U$8  [LOGO-LILYPAD]  119.18,55.17 0 bottom
U$9  [LOGO-LILYPAD]  22.4,86.92 0 bottom
U$10  [LOGO-LILYPAD]  54.66,86.92 0 bottom
U$11  [LOGO-LILYPAD]  86.92,86.92 0 bottom
U$12  [LOGO-LILYPAD]  119.18,86.92 0 bottom
U$13  [LOGO-LILYPAD]  22.4,118.67 0 bottom
U$14  [LOGO-LILYPAD]  54.66,118.67 0 bottom
U$15  [LOGO-LILYPAD]  86.92,118.67 0 bottom
U$16  [LOGO-LILYPAD]  119.18,118.67 0 bottom
U$17  [LOGO-LILYPAD]  22.4,150.42 0 bottom
U$18  [LOGO-LILYPAD]  54.66,150.42 0 bottom
U$19  [LOGO-LILYPAD]  86.92,150.42 0 bottom
U$20  [LOGO-LILYPAD]  119.18,150.42 0 bottom
U$21  [LOGO-LILYPAD]  22.4,182.17 0 bottom
U$22  [LOGO-LILYPAD]  54.66,182.17 0 bottom
U$23  [LOGO-LILYPAD]  86.92,182.17 0 bottom
U$24  [LOGO-LILYPAD]  119.18,182.17 0 bottom
U$25  [LOGO-LILYPAD]  22.4,213.92 0 bottom
U$26  [LOGO-LILYPAD]  54.66,213.92 0 bottom
U$27  [LOGO-LILYPAD]  86.92,213.92 0 bottom
U$28  [LOGO-LILYPAD]  119.18,213.92 0 bottom
U$29  [LOGO-LILYPAD]  22.4,245.67 0 bottom
U$30  [LOGO-LILYPAD]  54.66,245.67 0 bottom
U$31  [LOGO-LILYPAD]  86.92,245.67 0 bottom
U$32  [LOGO-LILYPAD]  119.18,245.67 0 bottom

## Library data of the parts
BAT1-BAT32 = SparkFun-Electromechanical; PROD_ID: BATT-10373
BATB- BATB-1-BATB-63 BATT+ BATT+1-BATT+63 U$1-U$32 = LilyPad-Wearables
E$1 = SparkFun-Retired
E$5 E$6 FD1-FD64 LOGO1-LOGO64 = SparkFun-Aesthetics
S1-S32 = SparkFun-Electromechanical; PROD_ID: SWCH-08179; SF_ID: COM-00597

## Nets
GND: BAT1.NEGATIVE BATB-2.1 BATB-.1
GND1: BAT2.NEGATIVE BATB-1.1 BATB-3.1
GND2: BAT3.NEGATIVE BATB-4.1 BATB-5.1
GND3: BAT4.NEGATIVE BATB-6.1 BATB-7.1
GND4: BAT5.NEGATIVE BATB-8.1 BATB-9.1
GND5: BAT6.NEGATIVE BATB-10.1 BATB-11.1
GND6: BAT7.NEGATIVE BATB-12.1 BATB-13.1
GND7: BAT8.NEGATIVE BATB-14.1 BATB-15.1
GND8: BAT9.NEGATIVE BATB-16.1 BATB-17.1
GND9: BAT10.NEGATIVE BATB-18.1 BATB-19.1
GND10: BAT11.NEGATIVE BATB-20.1 BATB-21.1
GND11: BAT12.NEGATIVE BATB-22.1 BATB-23.1
GND12: BAT13.NEGATIVE BATB-24.1 BATB-25.1
GND13: BAT14.NEGATIVE BATB-26.1 BATB-27.1
GND14: BAT15.NEGATIVE BATB-28.1 BATB-29.1
GND15: BAT16.NEGATIVE BATB-30.1 BATB-31.1
GND16: BAT17.NEGATIVE BATB-32.1 BATB-33.1
GND17: BAT18.NEGATIVE BATB-34.1 BATB-35.1
GND18: BAT19.NEGATIVE BATB-36.1 BATB-37.1
GND19: BAT20.NEGATIVE BATB-38.1 BATB-39.1
GND20: BAT21.NEGATIVE BATB-40.1 BATB-41.1
GND21: BAT22.NEGATIVE BATB-42.1 BATB-43.1
GND22: BAT23.NEGATIVE BATB-44.1 BATB-45.1
GND23: BAT24.NEGATIVE BATB-46.1 BATB-47.1
GND24: BAT25.NEGATIVE BATB-48.1 BATB-49.1
GND25: BAT26.NEGATIVE BATB-50.1 BATB-51.1
GND26: BAT27.NEGATIVE BATB-52.1 BATB-53.1
GND27: BAT28.NEGATIVE BATB-54.1 BATB-55.1
GND28: BAT29.NEGATIVE BATB-56.1 BATB-57.1
GND29: BAT30.NEGATIVE BATB-58.1 BATB-59.1
GND30: BAT31.NEGATIVE BATB-60.1 BATB-61.1
GND31: BAT32.NEGATIVE BATB-62.1 BATB-63.1
N$1: BAT1.POSITIVE@1 BAT1.POSITIVE@2 BAT1.POSITIVE@3 BAT1.POSITIVE@4 S1.2
N$2: BATT+2.1 BATT+.1 S1.1
N$3: BAT2.POSITIVE@1 BAT2.POSITIVE@2 BAT2.POSITIVE@3 BAT2.POSITIVE@4 S2.2
N$4: BATT+1.1 BATT+3.1 S2.1
N$5: BAT3.POSITIVE@1 BAT3.POSITIVE@2 BAT3.POSITIVE@3 BAT3.POSITIVE@4 S3.2
N$6: BATT+4.1 BATT+5.1 S3.1
N$7: BAT4.POSITIVE@1 BAT4.POSITIVE@2 BAT4.POSITIVE@3 BAT4.POSITIVE@4 S4.2
N$8: BATT+6.1 BATT+7.1 S4.1
N$9: BAT5.POSITIVE@1 BAT5.POSITIVE@2 BAT5.POSITIVE@3 BAT5.POSITIVE@4 S5.2
N$10: BATT+8.1 BATT+9.1 S5.1
N$11: BAT6.POSITIVE@1 BAT6.POSITIVE@2 BAT6.POSITIVE@3 BAT6.POSITIVE@4 S6.2
N$12: BATT+10.1 BATT+11.1 S6.1
N$13: BAT7.POSITIVE@1 BAT7.POSITIVE@2 BAT7.POSITIVE@3 BAT7.POSITIVE@4 S7.2
N$14: BATT+12.1 BATT+13.1 S7.1
N$15: BAT8.POSITIVE@1 BAT8.POSITIVE@2 BAT8.POSITIVE@3 BAT8.POSITIVE@4 S8.2
N$16: BATT+14.1 BATT+15.1 S8.1
N$17: BAT9.POSITIVE@1 BAT9.POSITIVE@2 BAT9.POSITIVE@3 BAT9.POSITIVE@4 S9.2
N$18: BATT+16.1 BATT+17.1 S9.1
N$19: BAT10.POSITIVE@1 BAT10.POSITIVE@2 BAT10.POSITIVE@3 BAT10.POSITIVE@4 S10.2
N$20: BATT+18.1 BATT+19.1 S10.1
N$21: BAT11.POSITIVE@1 BAT11.POSITIVE@2 BAT11.POSITIVE@3 BAT11.POSITIVE@4 S11.2
N$22: BATT+20.1 BATT+21.1 S11.1
N$23: BAT12.POSITIVE@1 BAT12.POSITIVE@2 BAT12.POSITIVE@3 BAT12.POSITIVE@4 S12.2
N$24: BATT+22.1 BATT+23.1 S12.1
N$25: BAT13.POSITIVE@1 BAT13.POSITIVE@2 BAT13.POSITIVE@3 BAT13.POSITIVE@4 S13.2
N$26: BATT+24.1 BATT+25.1 S13.1
N$27: BAT14.POSITIVE@1 BAT14.POSITIVE@2 BAT14.POSITIVE@3 BAT14.POSITIVE@4 S14.2
N$28: BATT+26.1 BATT+27.1 S14.1
N$29: BAT15.POSITIVE@1 BAT15.POSITIVE@2 BAT15.POSITIVE@3 BAT15.POSITIVE@4 S15.2
N$30: BATT+28.1 BATT+29.1 S15.1
N$31: BAT16.POSITIVE@1 BAT16.POSITIVE@2 BAT16.POSITIVE@3 BAT16.POSITIVE@4 S16.2
N$32: BATT+30.1 BATT+31.1 S16.1
N$33: BAT17.POSITIVE@1 BAT17.POSITIVE@2 BAT17.POSITIVE@3 BAT17.POSITIVE@4 S17.2
N$34: BATT+32.1 BATT+33.1 S17.1
N$35: BAT18.POSITIVE@1 BAT18.POSITIVE@2 BAT18.POSITIVE@3 BAT18.POSITIVE@4 S18.2
N$36: BATT+34.1 BATT+35.1 S18.1
N$37: BAT19.POSITIVE@1 BAT19.POSITIVE@2 BAT19.POSITIVE@3 BAT19.POSITIVE@4 S19.2
N$38: BATT+36.1 BATT+37.1 S19.1
N$39: BAT20.POSITIVE@1 BAT20.POSITIVE@2 BAT20.POSITIVE@3 BAT20.POSITIVE@4 S20.2
N$40: BATT+38.1 BATT+39.1 S20.1
N$41: BAT21.POSITIVE@1 BAT21.POSITIVE@2 BAT21.POSITIVE@3 BAT21.POSITIVE@4 S21.2
N$42: BATT+40.1 BATT+41.1 S21.1
N$43: BAT22.POSITIVE@1 BAT22.POSITIVE@2 BAT22.POSITIVE@3 BAT22.POSITIVE@4 S22.2
N$44: BATT+42.1 BATT+43.1 S22.1
N$45: BAT23.POSITIVE@1 BAT23.POSITIVE@2 BAT23.POSITIVE@3 BAT23.POSITIVE@4 S23.2
N$46: BATT+44.1 BATT+45.1 S23.1
N$47: BAT24.POSITIVE@1 BAT24.POSITIVE@2 BAT24.POSITIVE@3 BAT24.POSITIVE@4 S24.2
N$48: BATT+46.1 BATT+47.1 S24.1
N$49: BAT25.POSITIVE@1 BAT25.POSITIVE@2 BAT25.POSITIVE@3 BAT25.POSITIVE@4 S25.2
N$50: BATT+48.1 BATT+49.1 S25.1
N$51: BAT26.POSITIVE@1 BAT26.POSITIVE@2 BAT26.POSITIVE@3 BAT26.POSITIVE@4 S26.2
N$52: BATT+50.1 BATT+51.1 S26.1
N$53: BAT27.POSITIVE@1 BAT27.POSITIVE@2 BAT27.POSITIVE@3 BAT27.POSITIVE@4 S27.2
N$54: BATT+52.1 BATT+53.1 S27.1
N$55: BAT28.POSITIVE@1 BAT28.POSITIVE@2 BAT28.POSITIVE@3 BAT28.POSITIVE@4 S28.2
N$56: BATT+54.1 BATT+55.1 S28.1
N$57: BAT29.POSITIVE@1 BAT29.POSITIVE@2 BAT29.POSITIVE@3 BAT29.POSITIVE@4 S29.2
N$58: BATT+56.1 BATT+57.1 S29.1
N$59: BAT30.POSITIVE@1 BAT30.POSITIVE@2 BAT30.POSITIVE@3 BAT30.POSITIVE@4 S30.2
N$60: BATT+58.1 BATT+59.1 S30.1
N$61: BAT31.POSITIVE@1 BAT31.POSITIVE@2 BAT31.POSITIVE@3 BAT31.POSITIVE@4 S31.2
N$62: BATT+60.1 BATT+61.1 S31.1
N$63: BAT32.POSITIVE@1 BAT32.POSITIVE@2 BAT32.POSITIVE@3 BAT32.POSITIVE@4 S32.2
N$64: BATT+62.1 BATT+63.1 S32.1